# Altium PCB E5.3-oshw_Export_Altium.pcbdoc
Units mm, origin at the board's own origin, x right, y up, seen from the top; angles counter-clockwise.
Board outline 92.33 x 81.91 mm, 2 copper layers (Top Layer, Bottom Layer); 35 components, 30 nets, 139 pads, 0 vias.
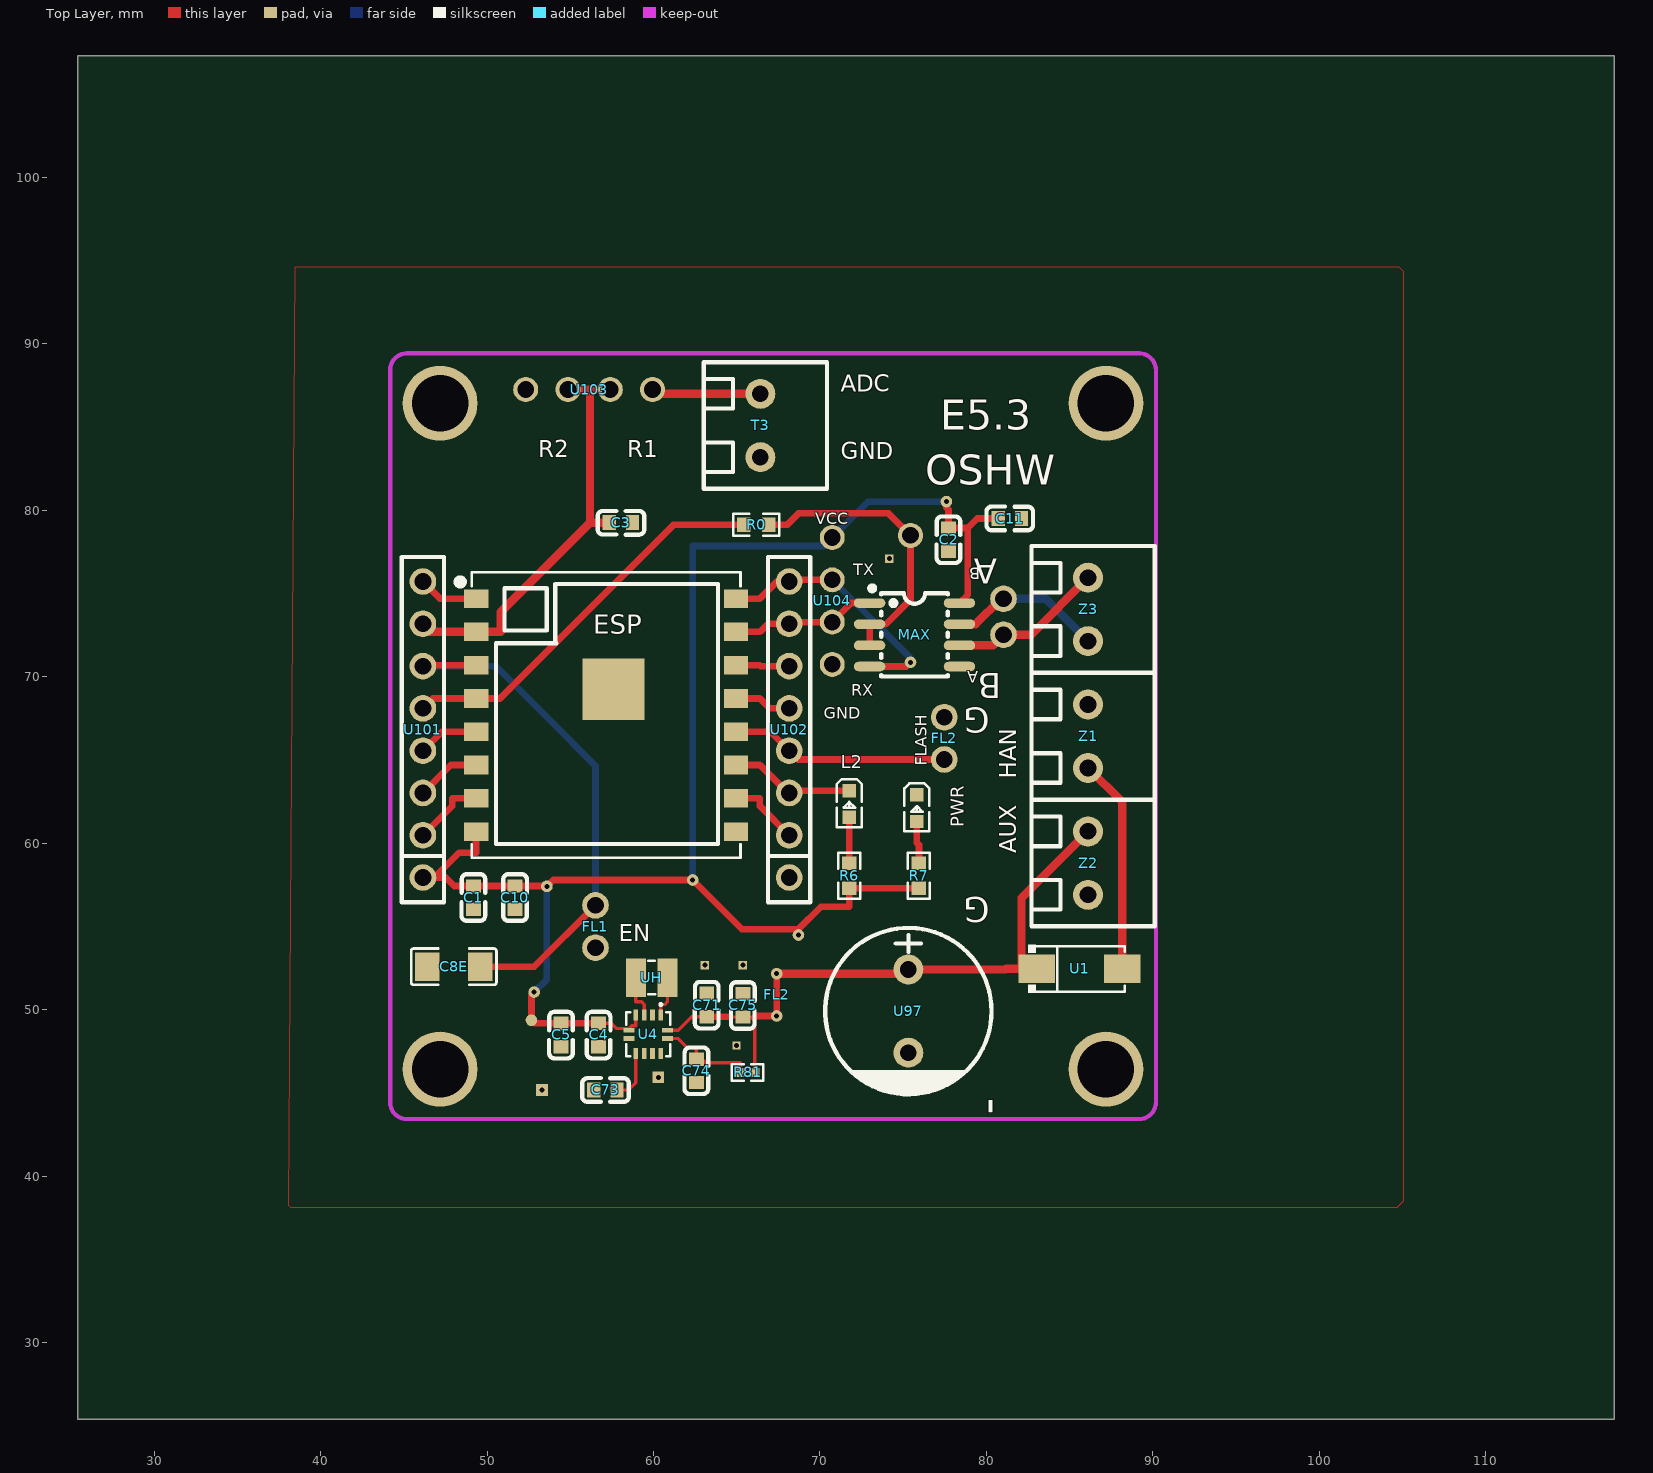
[diagram p0: Top Layer view]
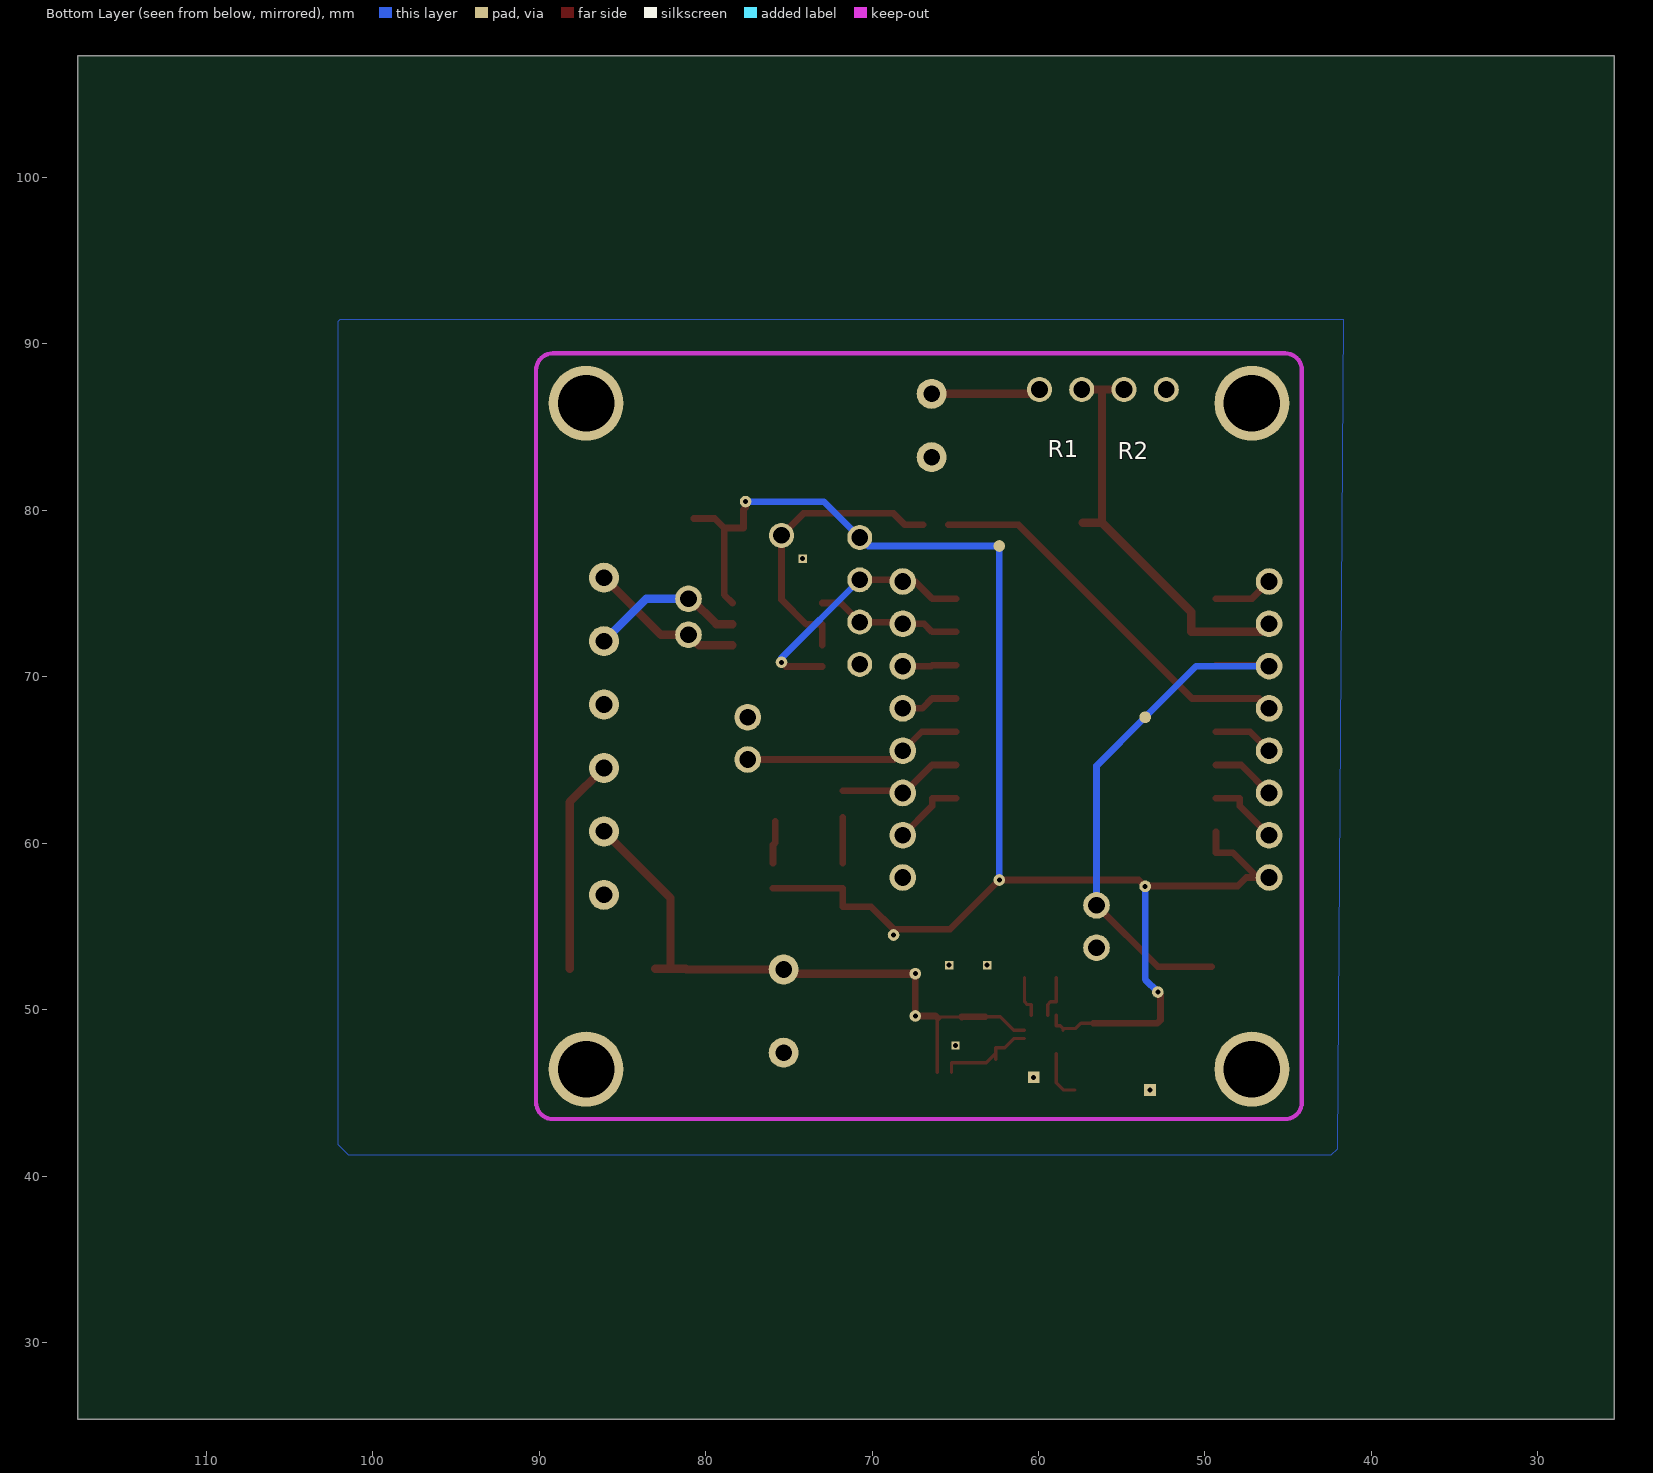
[diagram p1: Bottom Layer view, seen from below]

## Layer stack, top to bottom
Top Layer: signal copper (thickness not stored)
Dielectric: dielectric 0.32, FR-4, Dk 4.8
Bottom Layer: signal copper (thickness not stored)

## Board outline
117.729,25.4 25.4,25.4 25.4,107.315 117.729,107.315

## Components (designator, comment, footprint, x,y, rotation, side; value= is the part's Value field where it differs from the comment)
C1 "C0603" C0603 49.18,56.724 r270 top
C2 "C0603" C0603 77.724,78.232 r90 top
C3 "C0603" C0603 58.039,79.248 r180 top
C4 "C0603" C0603 56.7,48.477 r90 top
C5 "C0603" C0603 54.446,48.477 r90 top
C8E "C1206" C1206 48.006,52.578 r0 top
C10 "C0603" C0603 51.68,56.724 r270 top
C11 "C0603" C0603 81.407,79.502 r0 top
C71 "C0603" C0603 63.2,50.277 r90 top
C73 "C0603" C0603 57.113,45.175 r180 top
C74 "C0603" C0603 62.574,46.318 r270 top
C75 "C0603" C0603 65.368,50.255 r90 top
ESP "WIRELM-SMD_ESP-07S" WIRELM-SMD_ESP-07S 57.15,67.691 r270 top
FL1 "NIKI7-2PIN-VG" NIKI7-2PIN-VG#1 56.515,54.991 r270 top
FL2 "NIKI7-2PIN-VG" NIKI7-2PIN-VG#2 67.4,50.89 r270 top
FL2 "NIKI7-2PIN-VG" NIKI7-2PIN-VG#1 77.47,66.294 r90 top
L2 "LED0603-RD" LED0603-RD 71.755,62.357 r270 top
MAX "MAX3485AEASA+T" SO-8_L4.9-W3.9-P1.27-LS5.9-BL 75.68,72.517 r270 top
PWR "LED0603-RD" LED0603-RD 75.819,62.103 r270 top
R0 "R0603" R0603 66.167,79.121 r0 top
R6 "R0603" R0603 71.755,58.039 r90 top
R7 "R0603" R0603 75.946,58.039 r90 top
R81 "R0402" R0402 65.659,46.228 r0 top
T3 "ADC" CONN-TH_2P-P3.81_L7.4-W7.6 66.421,85.09 r270 top
U1 "SMA_L4.2-W2.6-LS5.3-RD" SMA_L4.2-W2.6-LS5.3-RD 85.598,52.451 r0 top
U4 "TPS63051RMWR" QFN-12_L2.5-W2.5-P0.50-TL 59.69,48.514 r270 top
U97 "CAP-TH_BD10.0-P5.00-D0.6-FD-A" CAP-TH_BD10.0-P5.00-D0.6-FD-A 75.311,49.911 r270 top
U101 "HDR-TH_8P-P2.54-V-M-3" HDR-TH_8P-P2.54-V-M-3 46.15,66.826 r90 top
U102 "HDR-TH_8P-P2.54-V-M-3" HDR-TH_8P-P2.54-V-M-3 68.15,66.826 r90 top
U103 "NIKI-4P-HEADER" NIKI-4P-HEADER 56.134,87.249 r180 top
U104 "NIKI-4P-HEADER" NIKI-4P-HEADER 70.739,74.549 r90 top
UH "1.5uH" IND-SMD_L2.5-W2.0_SWPA252010S1R0MT 59.89,51.914 r180 top
Z1 "CONN-TH_2P-P3.81_L7.4-W7.6" CONN-TH_2P-P3.81_L7.4-W7.6 86.106,66.421 r270 top
Z2 "CONN-TH_2P-P3.81_L7.4-W7.6" CONN-TH_2P-P3.81_L7.4-W7.6 86.106,58.801 r270 top
Z3 "CONN-TH_2P-P3.81_L7.4-W7.6" CONN-TH_2P-P3.81_L7.4-W7.6 86.106,74.041 r270 top

## Footprints (in the part's own frame and the unit in brackets; to place one, negate y for a bottom-side part, rotate by r counter-clockwise, add the part's x,y. Pads: shape width x height; smd on the part's side, far side on the other; paste and mask are expansions set on the pad)
C0603 [mm]
  rect 0.8x0.9 smd paste+0 mask+0.051: 1(-0.7,0) 2(0.7,0)
  silkscreen extent -1.41,-0.71 1.39,0.72
C1206 [mm]
  rect 1.485x1.728 smd paste-100 mask+0.051: 1(-1.593,0) 2(1.593,0)
  silkscreen extent -2.56,-1.09 2.56,1.09
CAP-TH_BD10.0-P5.00-D0.6-FD-A [mm]
  round 1.8 hole 1 paste+0 mask+0.051: 1(-2.5,0) 2(2.5,0)
  silkscreen extent -5,-5 5.08,5
CONN-TH_2P-P3.81_L7.4-W7.6 [mm]
  round 1.8 hole 1 paste+0 mask+0.051: 1(-1.905,0) 2(1.905,0)
  silkscreen extent -3.8,-3.4 3.8,4
HDR-TH_8P-P2.54-V-M-3 [mm]
  round 1.6 hole 1 paste+0 mask+0.051: 1(-8.89,0) 2(-6.35,0) 3(-3.81,0) 4(-1.27,0) 5(1.27,0) 6(3.81,0) 7(6.35,0) 8(8.89,0)
  silkscreen extent -10.37,-1.27 10.37,1.27
IND-SMD_L2.5-W2.0_SWPA252010S1R0MT [mm]
  rect 1.2x2.3 smd paste+0 mask+0.051: 1(-0.95,0) 2(0.95,0)
  silkscreen extent -0.21,-1.02 0.21,1
LED0603-RD [mm]
  rect 0.8x0.8 smd paste+0 mask+0.051: 1(-0.799,-0.003) 2(0.799,0.004)
  silkscreen extent -1.49,-0.75 1.39,0.76
NIKI7-2PIN-VG#1 [mm]
  round 1.6 hole 1 paste+0 mask+0.051: 2(1.27,0) 3(-1.27,0)
NIKI7-2PIN-VG#2 [mm]
  round 0.7 hole 0.3 paste+0 mask+0.051: 2(1.27,0) 3(-1.27,0)
NIKI-4P-HEADER [mm]
  round 1.5 hole 1 paste+0 mask+0.051: 1(-3.81,0) 2(-1.27,0) 3(1.27,0) 4(3.81,0)
QFN-12_L2.5-W2.5-P0.50-TL [mm]
  rect 0.665x0.28 smd paste+0 mask+0.051: 1(-1.158,0.75) 2(-1.158,0.25) 3(-1.158,-0.25) 4(-1.158,-0.75) 7(1.158,-0.75) 8(1.158,-0.25) 9(1.158,0.25) 10(1.158,0.75)
  rect 0.28x0.665 smd paste+0 mask+0.051: 5(-0.25,-1.158) 6(0.25,-1.158) 11(0.25,1.158) 12(-0.25,1.158)
  silkscreen extent -1.86,-1.33 1.33,1.33
R0402 [mm]
  rect 0.566x0.54 smd paste-100 mask+0.051: 1(-0.433,0) 2(0.433,0)
  silkscreen extent -0.94,-0.5 0.94,0.5
R0603 [mm]
  rect 0.806x0.864 smd paste-100 mask+0.051: 1(-0.753,0) 2(0.753,0)
  silkscreen extent -1.39,-0.66 1.39,0.66
SMA_L4.2-W2.6-LS5.3-RD [mm]
  rect 2.2x1.7 smd paste+0 mask+0.051: 1(-2.566,0) 2(2.565,0)
  silkscreen extent -3.08,-1.44 2.7,1.44
SO-8_L4.9-W3.9-P1.27-LS5.9-BL [mm]
  oval 0.574x1.888 smd paste+0 mask+0.051: 1(-1.905,-2.699) 2(-0.635,-2.699) 3(0.635,-2.699) 4(1.905,-2.699) 5(1.905,2.699) 6(0.635,2.699) 7(-0.635,2.699) 8(-1.905,2.699)
  silkscreen extent -2.94,-2.69 2.5,2
WIRELM-SMD_ESP-07S [mm]
  rect 1.12x1.465 smd paste+0 mask+0.051: 1(-7,-7.808) 2(-5,-7.808) 3(-3,-7.808) 4(-1,-7.808) 5(1,-7.808) 6(3,-7.808) 7(5,-7.808) 8(7,-7.808) 9(7,7.807) 10(5,7.807) 11(3,7.807) 12(1,7.807) 13(-1,7.807) 14(-3,7.807) 15(-5,7.807) 16(-7,7.807)
  rect 3.7x3.7 smd paste+0 mask+0.05: 17(-1.55,0.45)
  silkscreen extent -8.58,-8.96 8.58,8.08

## Free pads (board coordinates)
  round 4.5 hole 3.4 paste+0 mask+0.051: 2(47.18,46.424) 2(47.18,86.424) 2(87.18,46.424) 2(87.18,86.424)
  round 1.6 hole 1 paste+0 mask+0.051: 2(81.026,74.676) 3(81.026,72.517)
  round 0.7 smd paste+0 mask+0.051: 3(52.668,49.366)
  round 0.7 hole 0.3 paste+0 mask+0.051: 3(52.832,51.054) 3(53.594,57.404) 3(62.357,57.785) 3(68.707,54.483) 3(75.438,70.866) 3(77.597,80.518)
  rect 0.7x0.7 hole 0.3 paste+0 mask+0.051: 3(53.303,45.175) 3(60.288,45.937)
  round 0.7 smd far side paste+0 mask+0.051: 3(53.594,67.564) 3(62.357,77.851)
  rect 0.5x0.5 hole 0.3 paste+0 mask+0.051: 3(63.082,52.668) 3(64.987,47.842) 3(65.368,52.668) 3(74.168,77.089)
  round 1.5 hole 1 paste+0 mask+0.051: 4(75.438,78.486)

## Nets (pads, with @x,y where several pads share a name; then routed paths per layer and width w, separated by ;. In a path a pad name is that pad's centre, name@x,y a point inside that pad or via, vN(x,y) a via of type N, cw(c..) or ccw(c..) an arc to the next point about the centre after c; other vN are vias at no path point)
5VHAN: U1.2 Z1.2 | length 12.9
  Top Layer w0.5: Z1.2 88.163,62.458 U1.2
A: MAX.6 pad.3@81.026,72.517 Z3.1 | length 9.4
  Top Layer w0.5: MAX.6 80.391,71.882 81.026,72.517 82.679,72.517 Z3.1
ADC: C3.2 ESP.2 U101.7 U103.2 U103.3 | length 25.3
  Top Layer w0.5: U101.7 46.635,72.691 ESP.2 50.826,72.691 50.826,73.885 56.188,79.248 ; U103.3 56.188,87.249 ; C3.2 56.188,79.248 ; U103.2 56.188,87.249 ; 56.188,79.248 56.188,87.249
ADC-IN: T3.1 U103.1 | length 6.6
  Top Layer w0.5: U103.1 60.198,86.995 T3.1
B: MAX.7 pad.2@81.026,74.676 Z3.2 | length 9.4
  Top Layer w0.5: MAX.7 79.351,73.152 80.875,74.676 pad.2@81.026,74.676
  Bottom Layer w0.5: pad.2@81.026,74.676 83.566,74.676 Z3.2
DC3VCC: C1.1 C2.2 C4.2 C5.2 C10.1 C11.1 ESP.8 MAX.8 pad.3@52.668,49.366 pad.3@52.832,51.054 pad.3@53.594,57.404 pad.3@62.357,57.785 pad.3@62.357,77.851 pad.3@68.707,54.483 pad.3@77.597,80.518 R6.1 R7.1 U4.4 U4.5 U101.1 U104.4 | length 99.5
  Top Layer w0.2: C4.2 57.075,49.177 57.45,49.177 57.76,48.867 U4.5@58.533,48.867 ; U4.5 U4.5@58.533,48.867 ; U4.4 58.94,49.039 58.704,49.039 U4.5@58.533,48.867
  Top Layer w0.4: U101.1 U101.1@46.834,57.936 ; ESP.8 49.343,59.43 48.328,59.43 U101.1@46.834,57.936 ; pad.3@52.832,51.054 52.668,50.89 52.668,49.366 52.857,49.177 C5.2 C4.2 ; pad.3@68.707,54.483 68.707,54.836 ; R7.1 R6.1 71.755,56.182 70.053,56.182 68.707,54.836 ; pad.3@77.597,80.518 77.597,80.16 77.724,80.033 C2.2 78.875,78.932 ; MAX.8 78.875,74.917 78.875,78.932 ; C11.1 79.445,79.502 78.875,78.932 ; U101.1@46.834,57.936 47.518,57.936 48.029,57.424 C1.1 C10.1 53.574,57.424 53.594,57.404 53.975,57.785 62.357,57.785 65.306,54.836 68.707,54.836
  Bottom Layer w0.4: pad.3@52.832,51.054 53.594,51.816 pad.3@53.594,57.404 ; pad.3@62.357,57.785 62.357,77.851 70.232,77.851 U104.4 72.899,80.518 pad.3@77.597,80.518
DC5VCC: C71.1 C75.1 FL2.2@67.4,49.62 FL2.3@67.4,52.16 R81.2 U1.1 U4.12 U97.1 Z2.1 | length 38.6
  Top Layer w0.2: U4.12 61.48,48.764 62.293,49.577 C71.1@63.2,49.577 ; 64.618,49.555 C75.1 65.864,49.555 ; R81.2 66.092,49.327 65.864,49.555 ; 66.118,49.555 65.864,49.555
  Top Layer w0.4: C71.1@63.2,49.577 64.596,49.577 64.618,49.555 ; 66.118,49.555 66.184,49.62 67.4,49.62 FL2.3@67.4,52.16
  Top Layer w0.5: FL2.3@67.4,52.16 75.06,52.16 U97.1 81.141,52.41 81.182,52.451 U1.1@82.107,52.451 ; U1.1 U1.1@82.107,52.451 ; Z2.1 82.107,56.706 U1.1@82.107,52.451
DIR: MAX.2 MAX.3 pad.4 R0.2 | length 17.5
  Top Layer w0.4: R0.2 68.024,79.121 68.713,79.81 74.114,79.81 pad.4 75.438,74.628 73.962,73.152 MAX.2 MAX.3
EN: C8E.2 ESP.3 FL1.3 pad.3@53.594,67.564 U101.6 | length 32.9
  Top Layer w0.4: U101.6 46.205,70.691 ESP.3 ; C8E.2 52.832,52.578 FL1.3
  Bottom Layer w0.4: U101.6 50.522,70.636 53.594,67.564 56.515,64.643 FL1.3
GND: C1.2 C2.1 C3.1 C4.1 C5.1 C8E.1 C10.2 C11.2 C71.2 C73.2 C74.2 C75.2 ESP.9 ESP.17 FL1.2 FL2.2@77.47,67.564 MAX.5 pad.3@53.303,45.175 pad.3@60.288,45.937 pad.3@63.082,52.668 pad.3@64.987,47.842 pad.3@65.368,52.668 pad.3@74.168,77.089 PWR.1 T3.2 U4.2 U4.6 U4.9 U4.10 U97.2 U102.1 U103.4 U104.1 Z1.1 Z2.2
IO0: ESP.12 FL2.3@77.47,65.024 U102.4 | length 13.2
  Top Layer w0.4: ESP.12 67.015,66.691 U102.4 68.681,65.025 FL2.3@77.47,65.025
IO2: ESP.11 L2.1 U102.3 | length 7.8
  Top Layer w0.4: ESP.11 66.391,64.691 67.925,63.157 U102.3@68.428,63.157 ; U102.3 68.291,63.157 U102.3@68.428,63.157 ; L2.1 U102.3@68.428,63.157
IO4: ESP.13 U102.5 | length 3.4
  Top Layer w0.4: ESP.13 66.391,68.691 66.986,68.096 U102.5
IO5: ESP.14 U102.6 | length 3.2
  Top Layer w0.4: ESP.14 66.391,70.691 66.446,70.636 U102.6
IO12: ESP.6 U101.3 | length 3.9
  Top Layer w0.4: U101.3 47.825,64.691 ESP.6
IO13: ESP.7 U101.2 | length 4.4
  Top Layer w0.4: U101.2 47.909,62.235 47.909,62.691 ESP.7@49.343,62.691
IO14: ESP.5 U101.4 | length 3.7
  Top Layer w0.4: U101.4 47.285,66.691 ESP.5
IO15: ESP.10 U102.2 | length 4.4
  Top Layer w0.4: ESP.10@64.957,62.691 66.391,62.691 66.391,62.235 U102.2
IO16: ESP.4 R0.1 U101.5 | length 23.8
  Top Layer w0.4: U101.5 46.745,68.691 ESP.4 50.776,68.691 61.206,79.121 R0.1
L1: U4.1 UH.1 | length 2.5
  Top Layer w0.2: U4.1 60.44,50.304 60.681,50.304 60.84,50.463 UH.1
L2: U4.3 UH.2 | length 2.6
  Top Layer w0.2: UH.2 58.94,50.463 59.281,50.463 59.44,50.304 U4.3
PG: U4.8
REG-EN: C74.1 R81.1 U4.11 | length 6.1
  Top Layer w0.2: U4.11 61.48,48.264 62.026,47.718 62.574,47.718 C74.1@62.574,47.368 ; C74.1 C74.1@62.574,47.368 ; R81.1 65.226,46.798 63.144,46.798 C74.1@62.574,47.368
RES3-L2: L2.2 R6.2 | length 2.8
  Top Layer w0.4: R6.2 71.755,59.896 71.759,59.9 L2.2
RES-PWR: PWR.2 R7.2 | length 2.6
  Top Layer w0.4: PWR.2 75.823,60.019 75.946,59.896 R7.2
RST: ESP.1 U101.8 | length 3.6
  Top Layer w0.4: U101.8 47.175,74.691 ESP.1
RX: ESP.15 MAX.1 U102.7 U104.2 | length 8.7
  Top Layer w0.4: ESP.15 66.391,72.691 66.875,73.176 U102.7 68.253,73.279 U104.2 71.882,74.422 MAX.1
S$1051: 
SSTART: C73.1 U4.7 | length 3.1
  Top Layer w0.2: C73.1 58.513,45.175 58.94,45.601 U4.7
TX: ESP.16 MAX.4 pad.3@75.438,70.866 U102.8 U104.3 | length 15.7
  Top Layer w0.4: ESP.16 66.391,74.691 67.415,75.716 U102.8 68.253,75.819 U104.3 ; MAX.4 75.184,70.612 pad.3@75.438,70.866
  Bottom Layer w0.4: U104.3 75.438,71.12 pad.3@75.438,70.866

## Polygon pours and split planes (outlines as drawn)
GND on Bottom Layer (solid): 41.656,91.44 101.981,91.44 102.108,91.313 102.108,41.91 101.473,41.275 42.418,41.275 42.037,41.656
GND on Top Layer (solid): 38.481,94.615 104.775,94.615 105.029,94.361 105.029,38.481 104.648,38.1 38.227,38.1 38.1,38.227

## Keep-outs
Keep-Out Layer:
  lines w0.254: 44.18,44.424 ccw(c45.18,44.424) 45.18,43.424 ; 44.18,88.424 cw(c45.18,88.424) 45.18,89.424 ; 89.18,43.424 ccw(c89.18,44.424) 90.18,44.424 ; 89.18,89.424 cw(c89.18,88.424) 90.18,88.424

## Silkscreen, mask and mechanical layers (free items; w line width, h text height)
Top Overlay:
  text "E5.3" at 77.216,84.825 h1.8
  text "R2" at 53.086,83.193 h1
  text "R1" at 58.42,83.193 h1
  text "GND" at 71.247,83.066 h1
  text "OSHW" at 76.327,81.523 h1.8
  text "VCC" at 69.723,79.152 h0.7
  text "A" at 80.645,77.077 h1.5 r180
  text "B" at 79.629,76.55 h0.7 r180
  text "TX" at 72.009,76.104 h0.7
  text "A" at 79.502,70.327 h0.7 r180
  text "B" at 80.899,70.219 h1.5 r180
  text "RX" at 71.882,68.865 h0.7
  text "G" at 80.203,68.148 h1.5 r180
  text "GND" at 70.231,67.468 h0.7
  text "FLASH" at 76.423,64.643 h0.7 r90
  text "HAN" at 81.78,63.881 h1 r90
  text "AUX" at 81.78,59.397 h1 r90
  text "G" at 80.203,56.748 h1.5 r180
  text "EN" at 57.912,54.11 h1
  text "-" at 81.026,43.688 h2.03 r90
Bottom Overlay:
  text "R1" at 59.436,83.193 h1
  text "R2" at 55.245,83.066 h1
Document:
  circle w0.1: c75.311,49.911 r6
  text "DC DC" at 59.309,39.243 h2.03